# Altium PCB PCB1.PcbDoc
Units mm, origin at the board's own origin, x right, y up, seen from the top; angles counter-clockwise.
Board outline 22.86 x 127 mm, 2 copper layers (Top Layer, Bottom Layer); 28 components, 23 nets, 82 pads, 15 vias.
Unrouted connection lines stored in the file: 1.
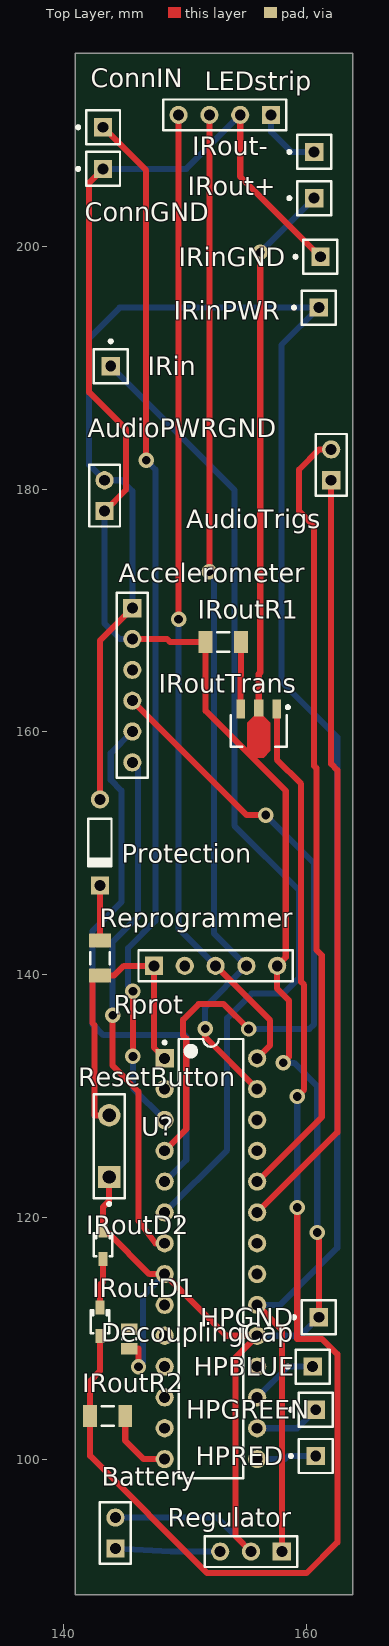
[diagram p0: Top Layer view]
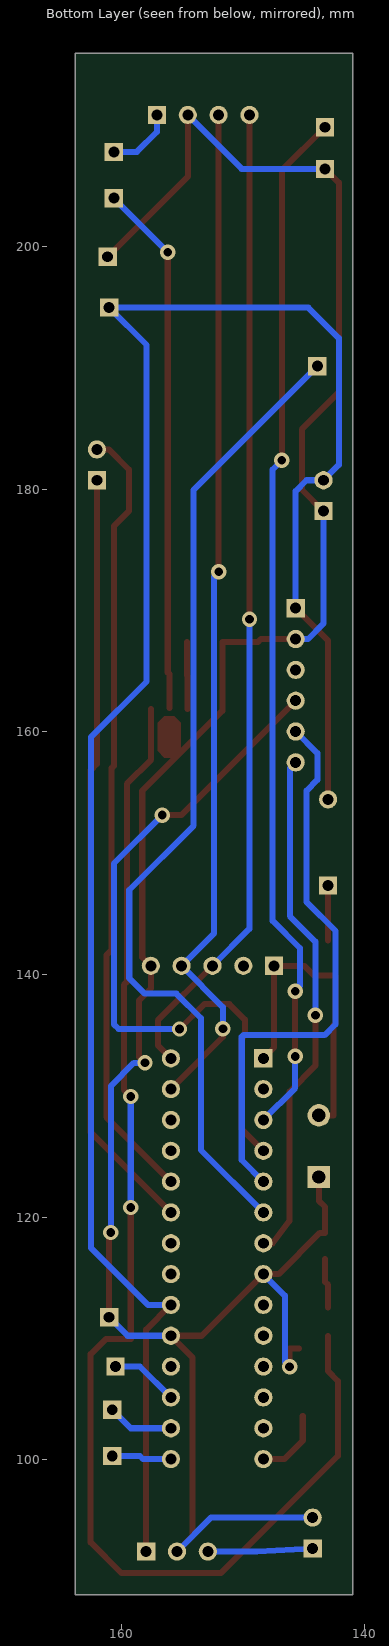
[diagram p1: Bottom Layer view, seen from below]

## Layer stack, top to bottom
Top Solder: solder mask 0.0102, Solder Resist, Dk 3.5
Top Layer: signal copper 0.0356
Dielectric 1: dielectric 0.32, FR-4, Dk 4.8
Bottom Layer: signal copper 0.0356
Bottom Solder: solder mask 0.0102, Solder Resist, Dk 3.5

## Board outline
140.97,88.9 163.83,88.9 163.83,215.9 140.97,215.9

## Design rules (kind name [scope] priority, off if disabled: settings)
Clearance [All] p1: gap=0.762
PolygonConnect [All] p1: connectstyle=Relief reliefconductorwidth=0.254 reliefentries=4 polygonreliefangle="90 Angle" airgapwidth=0.254
RoomDefinition Schematic [InComponentClass('Schematic')] p1: confinementstyle=ConfineIn formatcopy=TRUE lockcomponents=FALSE outline 113.665,23.749 441.198,23.749 441.198,45.339 113.665,45.339
RoutingVias [All] p1: holewidth=0.711 width=1.27 viastyle="Through Hole" minholewidth=0.711 minwidth=1.27 maxholewidth=0.711 maxwidth=1.27
SolderMaskExpansion [All] p1: expansion=0.102
Width [All] p1: maxlimit=0.5 minlimit=0.5 preferedwidth=0.5 minimp=50.000000 maximp=50.000000 favimp=50.000000
30 further rules are at their usual default settings.

## Components (designator, comment, footprint, x,y, rotation, side; value= is the part's Value field where it differs from the comment)
Accelerometer "Header 6" HDR1X6 145.669,170.18 r270 top
AudioPWRGND "Header 2" HDR1X2 143.383,178.181 r90 top
AudioTrigs "Header 2" HDR1X2 162.052,180.721 r90 top
Battery "Header 2" HDR1X2 144.272,92.71 r90 top
ConnGND "Plug" PIN1 143.256,206.375 r90 top
ConnIN "Plug" PIN1 143.256,209.804 r90 top
DecouplingCap "10uf" CAPC0805(2012)75_L 145.415,109.982 r90 top
HPBLUE "Plug" PIN1 160.528,107.696 r90 top
HPGND "Plug" PIN1 161.036,111.76 r90 top
HPGREEN "Plug" PIN1 160.782,104.14 r90 top
HPRED "Plug" PIN1 160.782,100.33 r90 top
IRin "Plug" PIN1 143.891,190.119 r0 top
IRinGND "Plug" PIN1 161.163,199.136 r90 top
IRinPWR "Plug" PIN1 161.036,194.945 r90 top
IRout+ "Plug" PIN1 160.655,203.962 r90 top
IRout- "Plug" PIN1 160.655,207.772 r90 top
IRoutD1 "ZHCS400" DIOD-SOD323-2_V 143.002,111.379 r90 top
IRoutD2 "ZHCS400" DIOD-SOD323-2_V 143.256,117.729 r90 top
IRoutR1 "1K 5% 1206(3216)" RESC1206(3216)_N 153.162,167.386 r0 top
IRoutR2 "7.2K 5% 1206(3216)" RESC1206(3216)_N 143.637,103.632 r0 top
IRoutTrans "BFN18" INF-SOT89_SC-62_M 156.083,160.274 r270 top
LEDstrip "Header 4" HDR1X4 157.099,210.82 r180 top
Protection "Diode 1N4148" DO-35 143.002,150.876 r270 top
Regulator "Header 3" HDR1X3 157.988,92.456 r180 top
Reprogrammer "Header 5" HDR1X5 147.447,140.716 r0 top
ResetButton "SW-SPST" SPST-2 143.764,125.857 r90 top
Rprot "1K 5% 1206(3216)" RESC1206(3216)_N 143.002,141.351 r90 top
U? "PIC16F72-I/SP" SPDIP300-SP28 152.146,116.586 r0 top

## Footprints (in the part's own frame and the unit in brackets; to place one, negate y for a bottom-side part, rotate by r counter-clockwise, add the part's x,y. Pads: shape width x height; smd on the part's side, far side on the other; paste and mask are expansions set on the pad)
CAPC0805(2012)75_L [mm] "Chip Capacitor, Body 2.0x1.2mm, Height 0.75mm, IPC High Density"
  rect 0.95x1.35 smd: 1(-0.8,0) 2(0.8,0)
  silkscreen extent -0.05,-0.58 0.05,0.58, body extent -1.1,-0.72 1.1,0.72, height 0.75
DIOD-SOD323-2_V [mil] "SMT Diode, 2 Leads, Body 1.7 x 1.3 mm"
  rect 45x30 smd: 1(-46.26,0) 2(46.26,0)
  silkscreen extent -37,-30 37,30, body extent -39,-27 38,28, height 43
DO-35 [mm] "Diode, Axial; Body 3.8 x 1.9 mm (LxDia. max), Lead Dia. 0.53 mm (max)"
  round 1.5 hole 0.9: 1(-3.55,0)
  rect 1.5x1.5 hole 0.9: 2(3.55,0)
  silkscreen extent -1.95,-0.95 2.05,0.95
HDR1X2 [mm] "Connector; Header; 2 Position"
  rect 1.5x1.5 hole 0.9: 1(0,0)
  round 1.5 hole 0.9: 2(2.54,0)
  silkscreen extent -1.27,-1.27 3.81,1.27
HDR1X3 [mm] "Connector; Header; 3 Position"
  rect 1.5x1.5 hole 0.9: 1(0,0)
  round 1.5 hole 0.9: 2(2.54,0) 3(5.08,0)
  silkscreen extent -1.27,-1.27 6.35,1.27
HDR1X4 [mm] "Connector; Header; 4 Position"
  rect 1.5x1.5 hole 0.9: 1(0,0)
  round 1.5 hole 0.9: 2(2.54,0) 3(5.08,0) 4(7.62,0)
  silkscreen extent -1.27,-1.27 8.89,1.27
HDR1X5 [mm] "Connector; Header; 5 Position"
  rect 1.5x1.5 hole 0.9: 1(0,0)
  round 1.5 hole 0.9: 2(2.54,0) 3(5.08,0) 4(7.62,0) 5(10.16,0)
  silkscreen extent -1.27,-1.27 11.43,1.27
HDR1X6 [mm] "Connector; Header; 6 Position"
  rect 1.5x1.5 hole 0.9: 1(0,0)
  round 1.5 hole 0.9: 2(2.54,0) 3(5.08,0) 4(7.62,0) 5(10.16,0) 6(12.7,0)
  silkscreen extent -1.27,-1.27 13.97,1.27
INF-SOT89_SC-62_M [mm] "SOT89, 3-Leads, Body 4.5x2.5mm, Pitch 1.5mm, IPC Low Density"
  rect 1.6x0.7 smd: 1(-1.6,1.5) 3(-1.6,-1.5)
  rect 1.4x0.8 smd: 2(-1.7,0)
  Top Layer region: -1,0.4 -0.45,0.95 1.85,0.95 2.4,0.4 2.4,-0.4 1.85,-0.95 -0.45,-0.95 -1,-0.4
  silkscreen extent -1.87,-2.3 1.5,2.53, body extent -1.1,-2.3 1.5,2.3, height 1.6
PIN1 [mm] "Connector; Plug"
  rect 1.5x1.5 hole 0.9: 1(0,0)
  silkscreen extent -1.4,-1.4 1.4,2.17
RESC1206(3216)_N [mm] "Chip Resistor, Body 3.2x1.6mm, IPC Medium Density"
  rect 1.15x1.8 smd: 1(-1.45,0) 2(1.45,0)
  silkscreen extent -0.5,-0.8 0.5,0.8, body extent -1.67,-0.87 1.67,0.87, height 0.75
SPDIP300-SP28 [mm] "DIP, 28-Leads, Row Spacing 7.62mm, Pitch 2.54mm, Body 34.9x6.8mm"
  rect 1.5x1.5 hole 0.9: 1(-3.81,16.51)
  round 1.5 hole 0.9: 2(-3.81,13.97) 3(-3.81,11.43) 4(-3.81,8.89) 5(-3.81,6.35) 6(-3.81,3.81) 7(-3.81,1.27) 8(-3.81,-1.27) 9(-3.81,-3.81) 10(-3.81,-6.35) 11(-3.81,-8.89) 12(-3.81,-11.43) 13(-3.81,-13.97) 14(-3.81,-16.51) 15(3.81,-16.51) 16(3.81,-13.97) 17(3.81,-11.43) 18(3.81,-8.89) 19(3.81,-6.35) 20(3.81,-3.81) 21(3.81,-1.27) 22(3.81,1.27) 23(3.81,3.81) 24(3.81,6.35) 25(3.81,8.89) 26(3.81,11.43) 27(3.81,13.97) 28(3.81,16.51)
  silkscreen extent -3.93,-18.1 2.65,18.1, body extent -3.55,-18.1 3.55,18.1, height 5.08
SPST-2 [mm] "Switch; 2 Leads"
  rect 1.85x1.85 hole 1.1: 1(-2.54,0)
  round 1.85 hole 1.1: 2(2.54,0)
  silkscreen extent -4.89,-1.27 4.28,1.27

## Part data
Accelerometer: "Header, 6-Pin"
AudioPWRGND AudioTrigs Battery: "Header, 2-Pin"
DecouplingCap: library part CMP-1036-01219-1, "CAP 22pF 16V ±5% 0805 (2012 Metric) Thickness 0.75mm SMD"
IRoutD1 IRoutD2: library part CMP-0303-00001-1, "Schottky Diode, 400mA"
IRoutR1 IRoutR2 Rprot: library part CMP-1014-00074-1, "1K 0.25W 5% 1206 (3216 Metric)  SMD"
IRoutTrans: library part CMP-1197-00012-1, "NPN Silicon High-Voltage Transistor, 300 V VCEO, 30 mA IC, SOT89, Reel, Green"
LEDstrip: "Header, 4-Pin"
Protection: "High Conductance Fast Diode"
Regulator: "Header, 3-Pin"
Reprogrammer: "Header, 5-Pin"
ResetButton: "Single-Pole, Single-Throw Switch"
U?: "8-Bit CMOS FLASH Microcontroller with A/D Converter, 2K (x14-Bit words) FLASH, 128 Bytes RAM, 28-Pin PDIP 300mil, Standard VDD Range, Industrial Temperature"

## Via types
v1: diameter 1.27, hole 0.711, Top Layer to Bottom Layer, 15 vias

## Nets (pads, with @x,y where several pads share a name; then routed paths per layer and width w, separated by ;. In a path a pad name is that pad's centre, name@x,y a point inside that pad or via, vN(x,y) a via of type N, cw(c..) or ccw(c..) an arc to the next point about the centre after c; other vN are vias at no path point)
NetAccelerometer_1: Accelerometer.1 AudioPWRGND.2 IRinPWR.1 Protection.1 Regulator.1 U?.20 | length 171.7
  Top Layer w0.5: Protection.1 143.002,167.513 Accelerometer.1 ; U?.20 157.988,110.744 Regulator.1
  Bottom Layer w0.5: Accelerometer.1 145.669,179.832 144.78,180.721 AudioPWRGND.2 142.113,181.991 142.113,192.43 144.628,194.945 IRinPWR.1 157.963,191.872 157.963,164.135 162.552,159.545 162.552,117.475 157.853,112.776 U?.20
NetAccelerometer_2: Accelerometer.2 AudioPWRGND.1 Battery.2 ConnGND.1 DecouplingCap.1 HPGND.1 IRinGND.1 IRoutD2.2 IRoutR1.1 LEDstrip.2 Regulator.2 Reprogrammer.5 ResetButton.1 U?.8 U?.19 | length 206.3
  Top Layer w0.5: ConnGND.1 142.113,205.232 142.113,187.96 145.161,184.912 145.161,179.959 AudioPWRGND.1 ; ResetButton.1 143.764,121.361 143.256,120.853 IRoutD2.2 143.256,118.72 143.675,118.72 147.078,115.316 U?.8 153.416,110.236 U?.19 154.178,108.458 154.178,93.726 Regulator.2 ; DecouplingCap.1 146.177,109.182 v1(146.177,107.696) ; Accelerometer.2 148.539,167.64 148.793,167.386 IRoutR1.1 151.712,161.724 158.311,155.125 158.311,141.42 Reprogrammer.5 157.607,138.833 158.569,137.871 158.569,133.195 v1(158.09,132.715) ; LEDstrip.2 154.559,205.74 IRinGND.1 ; v1(160.905,118.745) 161.036,118.614 HPGND.1
  Bottom Layer w0.5: ConnGND.1 150.114,206.375 LEDstrip.2 ; AudioPWRGND.1 143.383,168.91 144.653,167.64 Accelerometer.2 ; Battery.2 152.654,95.25 Regulator.2 ; v1(146.177,107.696) 146.558,108.077 146.558,113.538 U?.8 ; U?.19 159.512,110.236 HPGND.1 ; v1(158.09,132.715) 159,132.715 160.905,130.81 v1(160.905,118.745)
NetAccelerometer_4: Accelerometer.4 U?.4 | length 57.8
  Top Layer w0.5: Accelerometer.4 155.092,153.137 v1(156.664,153.137) ; U?.4 150.114,127.254 150.114,134.722 149.86,134.976 149.86,136.288 151.13,137.558 153.195,137.558 v1(155.245,135.509)
  Bottom Layer w0.5: v1(155.245,135.509) 160.264,135.509 160.655,135.9 160.655,149.145 v1(156.664,153.137)
NetAccelerometer_5: Accelerometer.5 U?.5 | length 47
  Bottom Layer w0.5: Accelerometer.5 143.891,158.242 143.891,156.029 144.764,155.156 144.764,145.959 142.392,143.587 142.392,135.89 143.281,135.001 149.987,135.001 150.114,134.874 150.114,124.714 U?.5
NetAccelerometer_6: Accelerometer.6 U?.7 | length 42.8
  Top Layer w0.5: v1(144.043,136.652) 144.043,132.486 146.177,130.353 146.177,119.71 147.574,117.856 U?.7
  Bottom Layer w0.5: v1(144.043,136.652) 144.043,142.697 146.152,144.805 146.152,156.997 Accelerometer.6
NetAudioTrigs_1: AudioTrigs.1 U?.23 | length 63.3
  Top Layer w0.5: U?.23 162.56,127 162.56,156.845 162.052,157.353 AudioTrigs.1
NetAudioTrigs_2: AudioTrigs.2 U?.24 | length 65
  Top Layer w0.5: U?.24 161.274,128.254 161.274,141.586 160.835,142.025 160.835,156.995 160.643,157.187 160.643,176.94 159.41,178.173 159.41,181.61 161.061,183.261 AudioTrigs.2
NetBattery_1: Battery.1 Regulator.3 | length 8.6
  Bottom Layer w0.5: Battery.1 148.844,92.456 Regulator.3
NetConnIN_1: ConnIN.1 U?.3 | length 85.8
  Top Layer w0.5: ConnIN.1 146.812,206.248 v1(146.812,182.372) ; v1(145.72,133.248) v1(145.72,138.633)
  Bottom Layer w0.5: v1(145.72,133.248) 145.72,130.632 U?.3 ; v1(145.72,138.633) 145.313,139.04 145.313,142.164 147.574,144.424 147.574,181.61 v1(146.812,182.372)
NetHPBLUE_1: HPBLUE.1 U?.17 | length 5.6
  Bottom Layer w0.5: U?.17 158.496,107.696 HPBLUE.1
NetHPGREEN_1: HPGREEN.1 U?.16 | length 5.5
  Bottom Layer w0.5: U?.16 159.258,102.616 HPGREEN.1
NetHPRED_1: HPRED.1 U?.15 | length 4.9
  Bottom Layer w0.5: U?.15 158.242,100.076 158.496,100.33 HPRED.1
NetIRin_1: IRin.1 U?.6 | length 82.3
  Bottom Layer w0.5: IRin.1 154.084,179.926 154.084,152.265 159.385,146.964 159.385,139.7 158.115,138.43 155.499,138.43 153.473,136.404 153.473,125.533 U?.6
NetIRout+_1: IRout+.1 IRoutTrans.2 | length 43.9
  Top Layer w0.5: IRoutTrans.2 156.083,164.77 156.21,164.897 v1(156.21,199.517)
  Bottom Layer w0.5: v1(156.21,199.517) IRout+.1
NetIRout-_1: IRout-.1 LEDstrip.1 | length 5.6
  Bottom Layer w0.5: LEDstrip.1 157.099,209.423 158.75,207.772 IRout-.1
NetIRoutD1_1: IRoutD1.1 IRoutR2.1 IRoutTrans.1 | length 108
  Top Layer w0.5: IRoutD1.1 143.002,107.317 142.187,106.502 IRoutR2.1 142.187,100.332 151.841,90.678 160.02,90.678 162.56,93.218 162.56,108.712 161.29,109.982 159.258,109.982 v1(159.258,120.802) ; IRoutTrans.1 157.583,157.702 159.573,155.712 159.573,139.397 159.831,139.139 159.831,130.52 v1(159.258,129.946)
  Bottom Layer w0.5: v1(159.258,120.802) v1(159.258,129.946)
NetIRoutD1_2: IRoutD1.2 IRoutD2.1 | length 4.1
  Top Layer w0.5: IRoutD1.2 143.002,114.427 143.256,114.681 IRoutD2.1
NetIRoutR1_2: IRoutR1.2 IRoutTrans.3 | length 5.5
  Top Layer w0.5: IRoutTrans.3 154.583,164.592 154.612,164.621 IRoutR1.2
NetIRoutR2_2: IRoutR2.2 U?.14 | length 5.9
  Top Layer w0.5: IRoutR2.2 145.087,101.6 146.611,100.076 U?.14
NetLEDstrip_3: LEDstrip.3 Reprogrammer.4 U?.27 | length 84.7
  Top Layer w0.5: v1(151.663,135.534) 151.663,134.849 U?.27 ; v1(152.019,173.177) LEDstrip.3
  Bottom Layer w0.5: v1(151.663,135.534) 151.663,137.312 Reprogrammer.4 152.414,143.369 152.414,172.782 v1(152.019,173.177)
NetLEDstrip_4: LEDstrip.4 Reprogrammer.3 U?.28 | length 81.3
  Top Layer w0.5: v1(149.479,169.266) LEDstrip.4 ; Reprogrammer.3 157.021,136.222 157.021,134.161 U?.28
  Bottom Layer w0.5: v1(149.479,169.266) 149.479,143.764 Reprogrammer.3
NetProtection_2: Protection.2 Rprot.2 | length 4.5
  Top Layer w0.5: Rprot.2 Protection.2
NetReprogrammer_1: Reprogrammer.1 ResetButton.2 Rprot.1 U?.1 | length 26.2
  Top Layer w0.5: ResetButton.2 142.545,128.397 142.545,135.839 142.392,135.992 142.392,139.901 Rprot.1 144.153,139.901 144.968,140.716 Reprogrammer.1 147.447,133.985 U?.1
pads on no net: Accelerometer.3 DecouplingCap.2 Reprogrammer.2 U?.2 U?.9 U?.10 U?.11 U?.12 U?.13 U?.18 U?.21 U?.22 U?.25 U?.26